# EAGLE board keyholders (EAGLE 9.4.0)
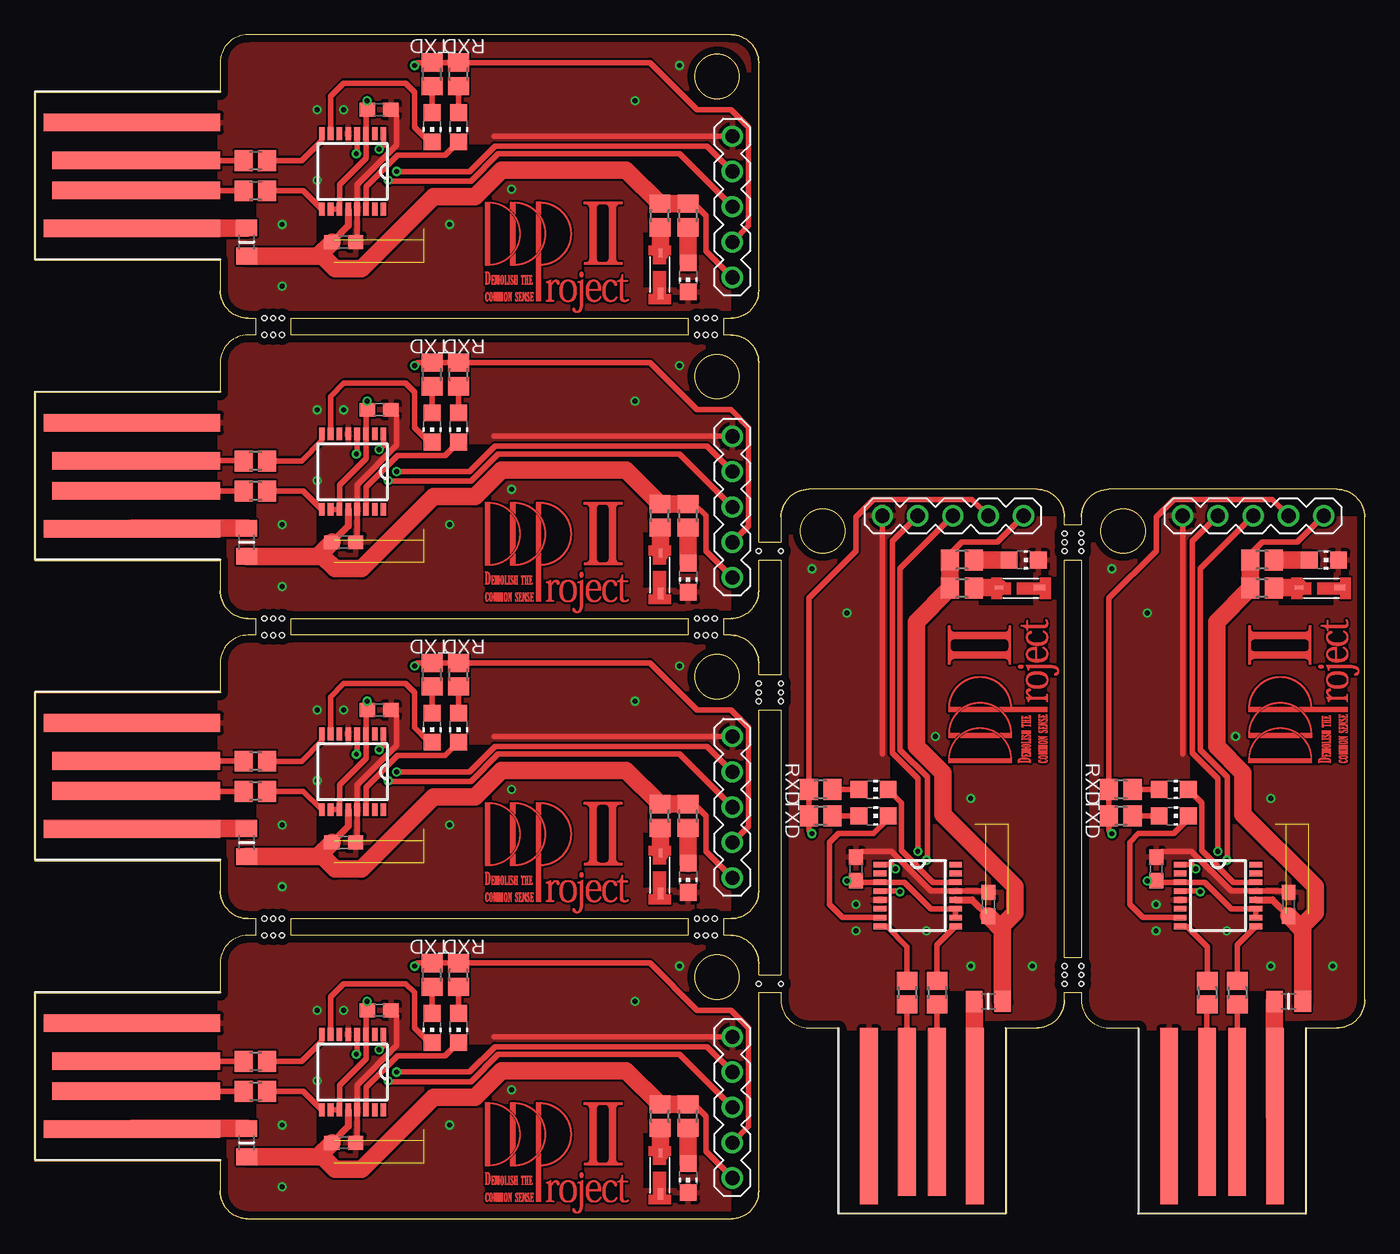
[diagram p0: board, top side]
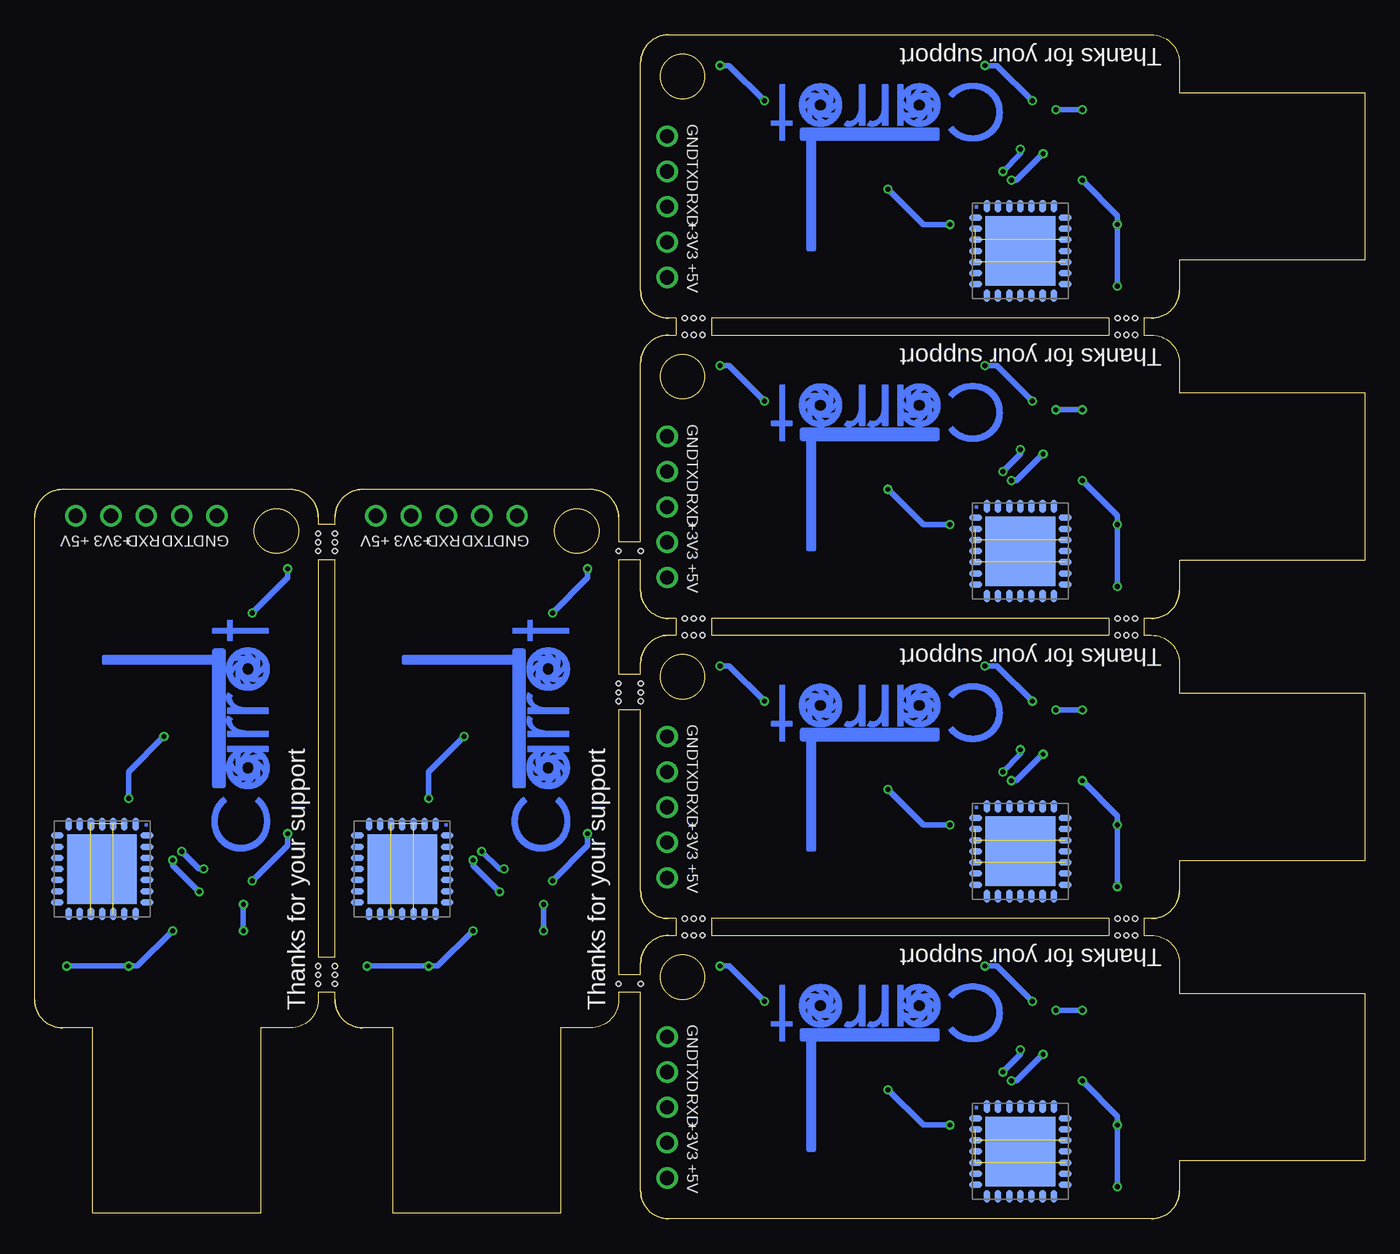
[diagram p1: board, bottom side, seen from below]

Size 95.65 x 85.16 mm. Coordinates in mm from the lower left corner, seen from the top.
Outline: 15.34,20.39 arc90 13.34,18.39
Outline: 50.07,20.39 arc-90 52.07,18.39
Outline: 52.07,2 arc-90 50.07,0
Outline: 15.34,0 arc-90 13.34,2
Outline: 13.34,2 arc90 15.34,0
Outline: 50.07,0 arc90 52.07,2
Outline: 52.07,18.39 arc90 50.07,20.39
Outline: 50.07,20.39 49.53,20.39 49.53,21.59 50.07,21.59
Outline: 15.34,20.39 15.88,20.39 15.88,21.59 15.34,21.59
Outline: 13.34,2 13.34,4.16 0,4.16 0,16.23 13.34,16.23 13.34,18.39
Outline: 13.34,2 arc90 15.34,0
Outline: 15.34,0 50.07,0
Outline: 50.07,0 arc90 52.07,2
Outline: 52.07,2 52.07,16.27 53.67,16.27 53.67,15.73
Outline: 52.07,18.39 52.07,17.54 53.67,17.54 53.67,36.59 52.07,36.59 52.07,23.59
Outline: 52.07,18.39 arc90 50.07,20.39
Outline: 15.34,20.39 arc90 13.34,18.39
Outline: 15.34,41.98 arc90 13.34,39.98
Outline: 50.07,41.98 arc-90 52.07,39.98
Outline: 52.07,23.59 arc-90 50.07,21.59
Outline: 15.34,21.59 arc-90 13.34,23.59
Outline: 13.34,23.59 arc90 15.34,21.59
Outline: 50.07,21.59 arc90 52.07,23.59
Outline: 52.07,39.98 arc90 50.07,41.98
Outline: 50.07,41.98 49.53,41.98 49.53,43.18 50.07,43.18
Outline: 15.34,41.98 15.88,41.98 15.88,43.18 15.34,43.18
Outline: 13.34,23.59 13.34,25.75 0,25.75 0,37.82 13.34,37.82 13.34,39.98
Outline: 13.34,23.59 arc90 15.34,21.59
Outline: 50.07,21.59 arc90 52.07,23.59
Outline: 52.07,39.98 52.07,39.13 53.67,39.13 53.67,47.39 52.07,47.39 52.07,45.18
Outline: 52.07,39.98 arc90 50.07,41.98
Outline: 15.34,41.98 arc90 13.34,39.98
Outline: 15.34,63.57 arc90 13.34,61.57
Outline: 50.07,63.57 arc-90 52.07,61.57
Outline: 52.07,45.18 arc-90 50.07,43.18
Outline: 15.34,43.18 arc-90 13.34,45.18
Outline: 13.34,45.18 arc90 15.34,43.18
Outline: 50.07,43.18 arc90 52.07,45.18
Outline: 52.07,61.57 arc90 50.07,63.57
Outline: 50.07,63.57 49.53,63.57 49.53,64.77 50.07,64.77
Outline: 15.34,63.57 15.88,63.57 15.88,64.77 15.34,64.77
Outline: 13.34,45.18 13.34,47.34 0,47.34 0,59.41 13.34,59.41 13.34,61.57
Outline: 13.34,45.18 arc90 15.34,43.18
Outline: 50.07,43.18 arc90 52.07,45.18
Outline: 52.07,61.57 52.07,48.66 53.67,48.66 53.67,50.47
Outline: 52.07,61.57 arc90 50.07,63.57
Outline: 15.34,63.57 arc90 13.34,61.57
Outline: 15.34,85.16 arc90 13.34,83.16
Outline: 50.07,85.16 arc-90 52.07,83.16
Outline: 52.07,66.77 arc-90 50.07,64.77
Outline: 15.34,64.77 arc-90 13.34,66.77
Outline: 13.34,66.77 arc90 15.34,64.77
Outline: 50.07,64.77 arc90 52.07,66.77
Outline: 52.07,83.16 arc90 50.07,85.16
Outline: 50.07,85.16 15.34,85.16
Outline: 13.34,66.77 13.34,68.93 0,68.93 0,81 13.34,81 13.34,83.16
Outline: 13.34,66.77 arc90 15.34,64.77
Outline: 50.07,64.77 arc90 52.07,66.77
Outline: 52.07,66.77 52.07,83.16
Outline: 52.07,83.16 arc90 50.07,85.16
Outline: 15.34,85.16 arc90 13.34,83.16
Outline: 53.67,15.73 arc90 55.67,13.73
Outline: 53.67,50.47 arc-90 55.67,52.47
Outline: 72.05,52.47 arc-90 74.06,50.47
Outline: 74.06,15.73 arc-90 72.06,13.73
Outline: 72.06,13.73 arc90 74.06,15.73
Outline: 74.06,50.47 arc90 72.05,52.47
Outline: 55.67,52.47 arc90 53.67,50.47
Outline: 72.06,13.73 69.89,13.73 69.89,0.4 57.83,0.4 57.83,13.73 55.67,13.73
Outline: 72.06,13.73 arc90 74.06,15.73
Outline: 74.06,15.73 74.06,16.27 75.26,16.27 75.26,15.73
Outline: 74.06,50.47 74.06,49.93 75.26,49.93 75.26,50.47
Outline: 74.06,50.47 arc90 72.05,52.47
Outline: 72.05,52.47 55.67,52.47
Outline: 55.67,52.47 arc90 53.67,50.47
Outline: 53.67,15.73 arc90 55.67,13.73
Outline: 75.26,15.73 arc90 77.26,13.73
Outline: 75.26,50.47 arc-90 77.26,52.47
Outline: 93.64,52.47 arc-90 95.65,50.47
Outline: 95.65,15.73 arc-90 93.65,13.73
Outline: 93.65,13.73 arc90 95.65,15.73
Outline: 95.65,50.47 arc90 93.64,52.47
Outline: 77.26,52.47 arc90 75.26,50.47
Outline: 93.65,13.73 91.48,13.73 91.48,0.4 79.42,0.4 79.42,13.73 77.26,13.73
Outline: 93.65,13.73 arc90 95.65,15.73
Outline: 95.65,15.73 95.65,50.47
Outline: 95.65,50.47 arc90 93.64,52.47
Outline: 93.64,52.47 77.26,52.47
Outline: 77.26,52.47 arc90 75.26,50.47
Outline: 75.26,15.73 arc90 77.26,13.73
Outline: 46.99,20.39 18.41,20.39 18.41,21.59 46.99,21.59 46.99,20.39
Outline: 46.99,41.98 18.41,41.98 18.41,43.18 46.99,43.18 46.99,41.98
Outline: 46.99,63.57 18.41,63.57 18.41,64.77 46.99,64.77 46.99,63.57
Outline: 74.06,18.81 74.06,47.39 75.26,47.39 75.26,18.81 74.06,18.81
Outline: circle at 49.07,17.39 radius 1.6
Outline: circle at 49.07,38.98 radius 1.6
Outline: circle at 49.07,60.57 radius 1.6
Outline: circle at 49.07,82.16 radius 1.6
Outline: circle at 56.67,49.47 radius 1.6
Outline: circle at 78.26,49.47 radius 1.6
Copper layers (1*16): Top 0.035mm / dielectric 1.6mm / Bottom 0.035mm
Design rules "Elecrow_2-layer_PCB_eagle_rule": minimum track width 6mil, minimum drill 12mil, track to track 6mil, track to pad 6mil, pad to pad 6mil, via to via 8mil, smd to smd 0mil, copper to edge 20mil, drill to drill 10mil, minimum pad ring 6mil, minimum via ring 6mil, stop-mask expansion 0mil, vias tented up to drill 100mil, thermal gap 10mil
Holes 0.35 mm at 16.51,20.39 17.14,20.39 17.78,20.39 47.62,20.39 48.26,20.39 48.9,20.39 52.07,16.91 16.51,21.59 16.51,41.98 17.14,41.98 17.78,41.98 47.62,41.98 48.26,41.98 48.9,41.98 52.07,37.23 52.07,37.86 52.07,38.5 17.14,21.59 17.78,21.59 47.62,21.59 48.26,21.59 48.9,21.59 16.51,43.18 16.51,63.57 17.14,63.57 17.78,63.57 47.62,63.57 48.26,63.57 48.9,63.57 17.14,43.18 17.78,43.18 47.62,43.18 48.26,43.18 48.9,43.18 16.51,64.77 17.14,64.77 17.78,64.77 47.62,64.77 48.26,64.77 48.9,64.77 74.06,16.91 53.67,16.91 53.67,48.02 74.06,17.54 74.06,18.18 74.06,48.02 74.06,48.66 74.06,49.29 75.26,16.91 75.26,17.54 75.26,18.18 75.26,48.02 75.26,48.66 75.26,49.29 53.67,38.5 53.67,37.86 53.67,37.23 52.07,48.02
tRestrict: 60 lines

## Footprints (pad centres in the part's own frame; a part is rotated, then mirrored left to right if it is on the bottom)
C1608 = smd 1.1 x 1: 1 -0.85,0; 2 0.85,0
R0805 = smd 1.3 x 1.5: 1 -0.85,0; 2 0.85,0
QFPN-28 = smd 0.9 x 0.45: 1 -3.225,2.4; 2 -3.225,1.6; 3 -3.225,0.8; 4 -3.225,0; 5 -3.225,-0.8; 6 -3.225,-1.6; 7 -3.225,-2.4; 15 3.225,-2.4; 16 3.225,-1.6; 17 3.225,-0.8; 18 3.225,0; 19 3.225,0.8; 20 3.225,1.6; 21 3.225,2.4 | smd 0.45 x 0.9: 8 -2.4,-3.225; 9 -1.6,-3.225; 10 -0.8,-3.225; 11 0,-3.225; 12 0.8,-3.225; 13 1.6,-3.225; 14 2.4,-3.225; 22 2.4,3.225; 23 1.6,3.225; 24 0.8,3.225; 25 0,3.225; 26 -0.8,3.225; 27 -1.6,3.225; 28 -2.4,3.225 | smd 5 x 5: TH 0,0
SSOP16 = smd 0.914 x 0.406: 1 -2.718,2.223; 2 -2.718,1.587; 3 -2.718,0.953; 4 -2.718,0.318; 5 -2.718,-0.318; 6 -2.718,-0.953; 7 -2.718,-1.587; 8 -2.718,-2.223; 9 2.718,-2.223; 10 2.718,-1.587; 11 2.718,-0.953; 12 2.718,-0.318; 13 2.718,0.318; 14 2.718,0.953; 15 2.718,1.587; 16 2.718,2.223
CHIP-LED0805 = smd 1.2 x 1.2: A 0,-1.05; C 0,1.05
MA05-1 = drill 1.016: 1 -5.08,0; 2 -2.54,0; 3 0,0; 4 2.54,0; 5 5.08,0
USB = smd 1.27 x 12.065: D+ 7.176,6.032; D- 5.016,6.032 | smd 1.27 x 12.7: GND 9.906,6.35; VCC 2.286,6.35
NSSW157T = smd 0.61 x 0.305: ANODE 3.683,0.711 | smd 0.813 x 0.406: CATHODE 0.762,0.711
F0805MP = smd 1.2 x 1.5: 1 -1.016,0; 2 1.016,0

## Placement (x,y rotation side)
C1  0.1u  [C1608]  22.23,5.48 0 top
C2  0.1u  [C1608]  24.77,15 0 top
C3  0.1u  [C1608]  22.23,27.07 0 top
C4  0.1u  [C1608]  24.77,36.59 0 top
C5  0.1u  [C1608]  22.23,48.66 0 top
C6  0.1u  [C1608]  24.77,58.18 0 top
C7  0.1u  [C1608]  22.23,70.25 0 top
C8  0.1u  [C1608]  24.77,79.77 0 top
C9  0.1u  [C1608]  68.58,22.62 90 top
C10  0.1u  [C1608]  59.05,25.16 90 top
C11  0.1u  [C1608]  90.17,22.62 90 top
C12  0.1u  [C1608]  80.64,25.16 90 top
FT-R1  330  [R0805]  28.57,17.54 90 top
FT-R2  330  [R0805]  30.48,17.54 90 top
FT-R3  27  [R0805]  15.88,11.32 180 top
FT-R4  27  [R0805]  15.88,9.16 180 top
FT-R5  330  [R0805]  46.99,7.38 90 top
FT-R6  100  [R0805]  44.96,7.38 90 top
FT-R7  330  [R0805]  28.57,39.13 90 top
FT-R8  330  [R0805]  30.48,39.13 90 top
FT-R9  27  [R0805]  15.88,32.91 180 top
FT-R10  27  [R0805]  15.88,30.75 180 top
FT-R11  330  [R0805]  46.99,28.97 90 top
FT-R12  100  [R0805]  44.96,28.97 90 top
FT-R13  330  [R0805]  28.57,60.72 90 top
FT-R14  330  [R0805]  30.48,60.72 90 top
FT-R15  27  [R0805]  15.88,54.5 180 top
FT-R16  27  [R0805]  15.88,52.34 180 top
FT-R17  330  [R0805]  46.99,50.56 90 top
FT-R18  100  [R0805]  44.96,50.56 90 top
FT-R19  330  [R0805]  28.57,82.31 90 top
FT-R20  330  [R0805]  30.48,82.31 90 top
FT-R21  27  [R0805]  15.88,76.09 180 top
FT-R22  27  [R0805]  15.88,73.93 180 top
FT-R23  330  [R0805]  46.99,72.15 90 top
FT-R24  100  [R0805]  44.96,72.15 90 top
FT-R25  330  [R0805]  56.52,28.97 180 top
FT-R26  330  [R0805]  56.52,30.88 180 top
FT-R27  27  [R0805]  62.74,16.27 270 top
FT-R28  27  [R0805]  64.9,16.27 270 top
FT-R29  330  [R0805]  66.67,47.39 180 top
FT-R30  100  [R0805]  66.67,45.35 180 top
FT-R31  330  [R0805]  78.11,28.97 180 top
FT-R32  330  [R0805]  78.11,30.88 180 top
FT-R33  27  [R0805]  84.33,16.27 270 top
FT-R34  27  [R0805]  86.49,16.27 270 top
FT-R35  330  [R0805]  88.27,47.39 180 top
FT-R36  100  [R0805]  88.27,45.35 180 top
IC1  LIS3LV02DQ  [QFPN-28]  24.77,4.84 0 bottom
IC2  FT230XS  [SSOP16]  22.86,32.15 270 top
IC3  FT230XS  [SSOP16]  22.86,10.56 270 top
IC4  LIS3LV02DQ  [QFPN-28]  24.77,26.43 0 bottom
IC5  FT230XS  [SSOP16]  22.86,53.74 270 top
IC6  LIS3LV02DQ  [QFPN-28]  24.77,48.02 0 bottom
IC7  FT230XS  [SSOP16]  22.86,75.33 270 top
IC8  LIS3LV02DQ  [QFPN-28]  24.77,69.61 0 bottom
IC9  FT230XS  [SSOP16]  63.5,23.26 0 top
IC10  LIS3LV02DQ  [QFPN-28]  69.22,25.16 270 bottom
IC11  FT230XS  [SSOP16]  85.09,23.26 0 top
IC12  LIS3LV02DQ  [QFPN-28]  90.81,25.16 270 bottom
LED1  [CHIP-LED0805]  46.99,24.53 180 top
LED2  [CHIP-LED0805]  46.99,46.12 180 top
LED3  [CHIP-LED0805]  46.99,2.94 180 top
LED4  [CHIP-LED0805]  46.99,67.71 180 top
LED5  [CHIP-LED0805]  71.12,47.39 270 top
LED6  [CHIP-LED0805]  92.71,47.39 270 top
RX-LED  [CHIP-LED0805]  30.48,13.73 180 top
RX-LED1  [CHIP-LED0805]  30.48,35.32 180 top
RX-LED2  [CHIP-LED0805]  30.48,56.91 180 top
RX-LED3  [CHIP-LED0805]  30.48,78.5 180 top
RX-LED4  [CHIP-LED0805]  60.33,30.88 270 top
RX-LED5  [CHIP-LED0805]  81.92,30.88 270 top
SV1  [MA05-1]  50.16,8.02 90 top
SV2  [MA05-1]  50.16,29.61 90 top
SV3  [MA05-1]  50.16,51.2 90 top
SV4  [MA05-1]  50.16,72.79 90 top
SV5  [MA05-1]  66.04,50.56 180 top
SV6  [MA05-1]  87.63,50.56 180 top
TX-LED  [CHIP-LED0805]  28.57,13.73 180 top
TX-LED1  [CHIP-LED0805]  28.57,35.32 180 top
TX-LED2  [CHIP-LED0805]  28.57,56.91 180 top
TX-LED3  [CHIP-LED0805]  28.57,78.5 180 top
TX-LED4  [CHIP-LED0805]  60.33,28.97 270 top
TX-LED5  [CHIP-LED0805]  81.92,28.97 270 top
U$1  USB-PAD  [USB]  13.34,25.75 90 top
U$2  USB-PAD  [USB]  13.34,4.16 90 top
U$3  I-05318_ＮＳＳＷ１５７Ｔ  [NSSW157T]  45.72,1.03 90 top
U$4  I-05318_ＮＳＳＷ１５７Ｔ  [NSSW157T]  45.72,22.62 90 top
U$5  [CARROT]  26.04,16.91 180 bottom
U$6  [DDPROJECT2-TOP]  32.38,0.4 0 top
U$7  [CARROT]  26.04,38.5 180 bottom
U$8  [DDPROJECT2-TOP]  32.38,21.99 0 top
U$9  USB-PAD  [USB]  13.34,47.34 90 top
U$10  I-05318_ＮＳＳＷ１５７Ｔ  [NSSW157T]  45.72,44.21 90 top
U$11  [CARROT]  26.04,60.09 180 bottom
U$12  [DDPROJECT2-TOP]  32.38,43.58 0 top
U$13  USB-PAD  [USB]  13.34,68.93 90 top
U$14  I-05318_ＮＳＳＷ１５７Ｔ  [NSSW157T]  45.72,65.8 90 top
U$15  [CARROT]  26.04,81.68 180 bottom
U$16  [DDPROJECT2-TOP]  32.38,65.17 0 top
U$17  USB-PAD  [USB]  69.89,13.73 180 top
U$18  I-05318_ＮＳＳＷ１５７Ｔ  [NSSW157T]  73.03,46.12 180 top
U$19  [CARROT]  57.15,26.43 90 bottom
U$20  [DDPROJECT2-TOP]  73.66,32.78 90 top
U$21  USB-PAD  [USB]  91.48,13.73 180 top
U$22  I-05318_ＮＳＳＷ１５７Ｔ  [NSSW157T]  94.61,46.12 180 top
U$23  [CARROT]  78.74,26.43 90 bottom
U$24  [DDPROJECT2-TOP]  95.25,32.78 90 top
USB-POLY1  350mA  [F0805MP]  15.24,5.48 90 top
USB-POLY2  350mA  [F0805MP]  15.24,27.07 90 top
USB-POLY3  350mA  [F0805MP]  15.24,48.66 90 top
USB-POLY4  350mA  [F0805MP]  15.24,70.25 90 top
USB-POLY5  350mA  [F0805MP]  68.58,15.64 180 top
USB-POLY6  350mA  [F0805MP]  90.17,15.64 180 top

## Library data of the parts
C1-C12 = resistor
FT-R1-FT-R36 = 0@Mylibrary-main1
IC1 IC4 IC6 IC8 IC10 IC12 = st-microelectronics; MF: Arrow Electronics; MPN: LIS3LV02DQ; OC_FARNELL: 1220909; OC_NEWARK: 89K0642
IC2 IC3 IC5 IC7 IC9 IC11 = ftdichip
LED1-LED6 RX-LED RX-LED1-RX-LED5 TX-LED TX-LED1-TX-LED5 = led
SV1-SV6 = 0con-lstb; OC_FARNELL: unknown; OC_NEWARK: unknown
U$1 U$2 U$9 U$13 U$17 U$21 = USB-PAD
U$3 U$4 U$10 U$14 U$18 U$22 = Akizuki
U$5-U$8 U$11 U$12 U$15 U$16 U$19 U$20 U$23 U$24 = Carrot
USB-POLY1-USB-POLY6 = polyswitch

## Nets
+3V3-FT: C2.1 FT-R1.2 FT-R2.2 IC3.3 IC3.10 IC3.11 SV1.2
+3V3-FT1: C4.1 FT-R7.2 FT-R8.2 IC2.3 IC2.10 IC2.11 SV2.2
+3V3-FT2: C6.1 FT-R13.2 FT-R14.2 IC5.3 IC5.10 IC5.11 SV3.2
+3V3-FT3: C8.1 FT-R19.2 FT-R20.2 IC7.3 IC7.10 IC7.11 SV4.2
+3V3-FT4: C10.1 FT-R25.2 FT-R26.2 IC9.3 IC9.10 IC9.11 SV5.2
+3V3-FT5: C12.1 FT-R31.2 FT-R32.2 IC11.3 IC11.10 IC11.11 SV6.2
GND: IC1.2 IC1.5 IC1.17
GND1: IC4.2 IC4.5 IC4.17
GND2: IC6.2 IC6.5 IC6.17
GND3: IC8.2 IC8.5 IC8.17
GND4: IC10.2 IC10.5 IC10.17
GND5: IC12.2 IC12.5 IC12.17
GNDA: C1.2 C2.2 IC3.5 IC3.13 LED3.C SV1.5 U$2.GND U$3.CATHODE
GNDA1: C3.2 C4.2 IC2.5 IC2.13 LED1.C SV2.5 U$1.GND U$4.CATHODE
GNDA2: C5.2 C6.2 IC5.5 IC5.13 LED2.C SV3.5 U$9.GND U$10.CATHODE
GNDA3: C7.2 C8.2 IC7.5 IC7.13 LED4.C SV4.5 U$13.GND U$14.CATHODE
GNDA4: C9.2 C10.2 IC9.5 IC9.13 LED5.C SV5.5 U$17.GND U$18.CATHODE
GNDA5: C11.2 C12.2 IC11.5 IC11.13 LED6.C SV6.5 U$21.GND U$22.CATHODE
N$1: FT-R9.1 IC2.8
N$2: FT-R10.1 IC2.9
N$3: FT-R8.1 RX-LED1.A
N$4: FT-R7.1 TX-LED1.A
N$5: FT-R9.2 U$1.D+
N$6: FT-R10.2 U$1.D-
N$7: U$1.VCC USB-POLY2.2
N$8: FT-R11.1 LED1.A
N$9: FT-R12.1 U$4.ANODE
N$10: FT-R15.1 IC5.8
N$11: FT-R16.1 IC5.9
N$12: FT-R14.1 RX-LED2.A
N$13: FT-R13.1 TX-LED2.A
N$14: FT-R15.2 U$9.D+
N$15: FT-R16.2 U$9.D-
N$16: U$9.VCC USB-POLY3.2
N$17: FT-R17.1 LED2.A
N$18: FT-R18.1 U$10.ANODE
N$19: FT-R2.1 RX-LED.A
N$20: FT-R1.1 TX-LED.A
N$21: FT-R21.1 IC7.8
N$22: FT-R3.2 U$2.D+
N$23: FT-R3.1 IC3.8
N$24: FT-R4.1 IC3.9
N$25: FT-R4.2 U$2.D-
N$26: FT-R22.1 IC7.9
N$27: U$2.VCC USB-POLY1.2
N$28: FT-R5.1 LED3.A
N$29: FT-R6.1 U$3.ANODE
N$30: FT-R20.1 RX-LED3.A
N$31: FT-R19.1 TX-LED3.A
N$32: FT-R21.2 U$13.D+
N$33: FT-R22.2 U$13.D-
N$34: U$13.VCC USB-POLY4.2
N$35: FT-R23.1 LED4.A
N$36: FT-R24.1 U$14.ANODE
N$37: FT-R27.1 IC9.8
N$38: FT-R28.1 IC9.9
N$39: FT-R26.1 RX-LED4.A
N$40: FT-R25.1 TX-LED4.A
N$41: FT-R27.2 U$17.D+
N$42: FT-R28.2 U$17.D-
N$43: U$17.VCC USB-POLY5.2
N$44: FT-R29.1 LED5.A
N$45: FT-R30.1 U$18.ANODE
N$46: FT-R33.1 IC11.8
N$47: FT-R34.1 IC11.9
N$48: FT-R32.1 RX-LED5.A
N$49: FT-R31.1 TX-LED5.A
N$50: FT-R33.2 U$21.D+
N$51: FT-R34.2 U$21.D-
N$52: U$21.VCC USB-POLY6.2
N$53: FT-R35.1 LED6.A
N$54: FT-R36.1 U$22.ANODE
RXD: IC3.4 SV1.3
RXD1: IC2.4 SV2.3
RXD2: IC5.4 SV3.3
RXD3: IC7.4 SV4.3
RXD4: IC9.4 SV5.3
RXD5: IC11.4 SV6.3
RXLED: IC3.14 RX-LED.C
RXLED1: IC2.14 RX-LED1.C
RXLED2: IC5.14 RX-LED2.C
RXLED3: IC7.14 RX-LED3.C
RXLED4: IC9.14 RX-LED4.C
RXLED5: IC11.14 RX-LED5.C
TXD: IC3.1 SV1.4
TXD1: IC2.1 SV2.4
TXD2: IC5.1 SV3.4
TXD3: IC7.1 SV4.4
TXD4: IC9.1 SV5.4
TXD5: IC11.1 SV6.4
TXLED: IC3.7 TX-LED.C
TXLED1: IC2.7 TX-LED1.C
TXLED2: IC5.7 TX-LED2.C
TXLED3: IC7.7 TX-LED3.C
TXLED4: IC9.7 TX-LED4.C
TXLED5: IC11.7 TX-LED5.C
V+: C1.1 FT-R5.2 FT-R6.2 IC3.12 SV1.1 USB-POLY1.1
V+1: C3.1 FT-R11.2 FT-R12.2 IC2.12 SV2.1 USB-POLY2.1
V+2: C5.1 FT-R17.2 FT-R18.2 IC5.12 SV3.1 USB-POLY3.1
V+3: C7.1 FT-R23.2 FT-R24.2 IC7.12 SV4.1 USB-POLY4.1
V+4: C9.1 FT-R29.2 FT-R30.2 IC9.12 SV5.1 USB-POLY5.1
V+5: C11.1 FT-R35.2 FT-R36.2 IC11.12 SV6.1 USB-POLY6.1
VDD: IC1.3 IC1.19
VDD1: IC4.3 IC4.19
VDD2: IC6.3 IC6.19
VDD3: IC8.3 IC8.19
VDD4: IC10.3 IC10.19
VDD5: IC12.3 IC12.19
VDD_IO: IC1.11
VDD_IO1: IC4.11
VDD_IO2: IC6.11
VDD_IO3: IC8.11
VDD_IO4: IC10.11
VDD_IO5: IC12.11

## Tracks (layer width: path | path; a pad name or v marks a point on that pad's centre or on a via)
+3V3-FT  (via drill 0.35)
  Top 0.406: IC3.10 IC3.11 21.91,9.6 23.81,11.51 IC3.3 23.81,14.9 C2.1 v23.91,15.64 | SV1.2 51.33,6.65 51.33,13.73 50.06,15 47.62,15 44.23,18.39 FT-R2.2 FT-R1.2 27.52,18.39 v27.3,18.18
  Bottom 0.406: v23.91,15.64 26.45,18.18 v27.3,18.18
+3V3-FT1  (via drill 0.35)
  Top 0.406: IC2.10 IC2.11 21.91,31.19 23.81,33.1 IC2.3 23.81,36.49 C4.1 v23.91,37.23 | SV2.2 51.33,28.24 51.33,35.32 50.06,36.59 47.62,36.59 44.23,39.98 FT-R8.2 FT-R7.2 27.52,39.98 v27.3,39.77
  Bottom 0.406: v23.91,37.23 26.45,39.77 v27.3,39.77
+3V3-FT2  (via drill 0.35)
  Top 0.406: IC5.10 IC5.11 21.91,52.78 23.81,54.69 IC5.3 23.81,58.08 C6.1 v23.91,58.82 | SV3.2 51.33,49.83 51.33,56.91 50.06,58.18 47.62,58.18 44.23,61.57 FT-R14.2 FT-R13.2 27.52,61.57 v27.3,61.36
  Bottom 0.406: v23.91,58.82 26.45,61.36 v27.3,61.36
+3V3-FT3  (via drill 0.35)
  Top 0.406: IC7.10 IC7.11 21.91,74.37 23.81,76.28 IC7.3 23.81,79.67 C8.1 v23.91,80.41 | SV4.2 51.33,71.42 51.33,78.5 50.06,79.77 47.62,79.77 44.23,83.16 FT-R20.2 FT-R19.2 27.52,83.16 v27.3,82.95
  Bottom 0.406: v23.91,80.41 26.45,82.95 v27.3,82.95
+3V3-FT4  (via drill 0.35)
  Top 0.406: IC9.10 IC9.11 64.45,22.3 62.55,24.21 IC9.3 59.16,24.21 C10.1 v58.42,24.31 | SV5.2 67.41,51.73 60.33,51.73 59.05,50.46 59.05,48.02 55.66,44.63 FT-R26.2 FT-R25.2 55.66,27.92 v55.88,27.7
  Bottom 0.406: v58.42,24.31 55.88,26.85 v55.88,27.7
+3V3-FT5  (via drill 0.35)
  Top 0.406: IC11.10 IC11.11 86.04,22.3 84.14,24.21 IC11.3 80.75,24.21 C12.1 v80.01,24.31 | SV6.2 89,51.73 81.92,51.73 80.64,50.46 80.64,48.02 77.25,44.63 FT-R32.2 FT-R31.2 77.25,27.92 v77.47,27.7
  Bottom 0.406: v80.01,24.31 77.47,26.85 v77.47,27.7
GND  (2 unrouted)
GND1  (2 unrouted)
GND2  (2 unrouted)
GND3  (2 unrouted)
GND4  (2 unrouted)
GND5  (2 unrouted)
GNDA  (via drill 0.35)
  Top 0.406: C1.2 23.18,5.58 IC3.13 23.18,9.6 26.04,12.46 26.04,14.58 C2.2 | 33.02,13.1 SV1.5
  Bottom 0.406: v34.29,9.29 31.75,6.75 v29.84,6.75 | v17.78,2.3 v17.78,6.75 17.78,7.38 v20.32,9.92 | v20.32,15 v22.23,15 | v43.18,15.64 45.72,18.18 v46.35,18.18
  pour Top: 13.34,20.08 52.07,20.08 52.07,0.4 13.34,0.4
GNDA1  (via drill 0.35)
  Top 0.406: C3.2 23.18,27.17 IC2.13 23.18,31.19 26.04,34.05 26.04,36.17 C4.2 | 33.02,34.69 SV2.5
  Bottom 0.406: v34.29,30.88 31.75,28.34 v29.84,28.34 | v17.78,23.89 v17.78,28.34 17.78,28.97 v20.32,31.51 | v20.32,36.59 v22.23,36.59 | v43.18,37.23 45.72,39.77 v46.35,39.77
  pour Top: 13.34,41.67 52.07,41.67 52.07,21.99 13.34,21.99
GNDA2  (via drill 0.35)
  Top 0.406: C5.2 23.18,48.76 IC5.13 23.18,52.78 26.04,55.64 26.04,57.76 C6.2 | 33.02,56.28 SV3.5
  Bottom 0.406: v34.29,52.47 31.75,49.93 v29.84,49.93 | v17.78,45.48 v17.78,49.93 17.78,50.56 v20.32,53.1 | v20.32,58.18 v22.23,58.18 | v43.18,58.82 45.72,61.36 v46.35,61.36
  pour Top: 13.34,63.26 52.07,63.26 52.07,43.58 13.34,43.58
GNDA3  (via drill 0.35)
  Top 0.406: C7.2 23.18,70.35 IC7.13 23.18,74.37 26.04,77.23 26.04,79.35 C8.2 | 33.02,77.87 SV4.5
  Bottom 0.406: v34.29,74.06 31.75,71.52 v29.84,71.52 | v17.78,67.07 v17.78,71.52 17.78,72.15 v20.32,74.69 | v20.32,79.77 v22.23,79.77 | v43.18,80.41 45.72,82.95 v46.35,82.95
  pour Top: 13.34,84.85 52.07,84.85 52.07,65.17 13.34,65.17
GNDA4  (via drill 0.35)
  Top 0.406: C9.2 68.48,23.57 IC9.13 64.45,23.57 61.59,26.43 59.48,26.43 C10.2 | 60.96,33.42 SV5.5
  Bottom 0.406: v64.77,34.69 67.31,32.15 v67.31,30.24 | v71.75,18.18 v67.31,18.18 66.67,18.18 v64.14,20.72 | v59.05,20.72 v59.05,22.62 | v58.42,43.58 55.88,46.12 v55.88,46.75
  pour Top: 53.98,13.73 53.98,52.47 73.66,52.47 73.66,13.73
GNDA5  (via drill 0.35)
  Top 0.406: C11.2 90.07,23.57 IC11.13 86.04,23.57 83.19,26.43 81.06,26.43 C12.2 | 82.55,33.42 SV6.5
  Bottom 0.406: v86.36,34.69 88.9,32.15 v88.9,30.24 | v93.34,18.18 v88.9,18.18 88.27,18.18 v85.72,20.72 | v80.64,20.72 v80.64,22.62 | v80.01,43.58 77.47,46.12 v77.47,46.75
  pour Top: 75.56,13.73 75.56,52.47 95.25,52.47 95.25,13.73
N$1
  Top 0.406: IC2.8 20.64,34.37 19.18,32.91 FT-R9.1
N$2
  Top 0.406: IC2.9 19.32,30.75 FT-R10.1
N$3
  Top 0.406: FT-R8.1 RX-LED1.A
N$4
  Top 0.406: TX-LED1.A FT-R7.1
N$5
  Top 0.406: U$1.D+ 15,32.93 FT-R9.2
N$6
  Top 0.406: U$1.D- 7.32,30.75 FT-R10.2
N$7
  Top 1.27: U$1.VCC 7.03,28.08 USB-POLY2.2
N$8
  Top 1.27: LED1.A FT-R11.1
N$9
  Top 1.27: FT-R12.1 45.01,28.07 U$4.ANODE
N$10
  Top 0.406: IC5.8 20.64,55.96 19.18,54.5 FT-R15.1
N$11
  Top 0.406: IC5.9 19.32,52.34 FT-R16.1
N$12
  Top 0.406: FT-R14.1 RX-LED2.A
N$13
  Top 0.406: TX-LED2.A FT-R13.1
N$14
  Top 0.406: U$9.D+ 15,54.52 FT-R15.2
N$15
  Top 0.406: U$9.D- 7.32,52.34 FT-R16.2
N$16
  Top 1.27: U$9.VCC 7.03,49.67 USB-POLY3.2
N$17
  Top 1.27: LED2.A FT-R17.1
N$18
  Top 1.27: FT-R18.1 45.01,49.66 U$10.ANODE
N$19
  Top 0.406: FT-R2.1 RX-LED.A
N$20
  Top 0.406: TX-LED.A FT-R1.1
N$21
  Top 0.406: IC7.8 20.64,77.55 19.18,76.09 FT-R21.1
N$22
  Top 0.406: U$2.D+ 15,11.34 FT-R3.2
N$23
  Top 0.406: IC3.8 20.64,12.78 19.18,11.32 FT-R3.1
N$24
  Top 0.406: IC3.9 19.32,9.16 FT-R4.1
N$25
  Top 0.406: U$2.D- 7.32,9.16 FT-R4.2
N$26
  Top 0.406: IC7.9 19.32,73.93 FT-R22.1
N$27
  Top 1.27: U$2.VCC 7.03,6.49 USB-POLY1.2
N$28
  Top 1.27: LED3.A FT-R5.1
N$29
  Top 1.27: FT-R6.1 45.01,6.48 U$3.ANODE
N$30
  Top 0.406: FT-R20.1 RX-LED3.A
N$31
  Top 0.406: TX-LED3.A FT-R19.1
N$32
  Top 0.406: U$13.D+ 15,76.11 FT-R21.2
N$33
  Top 0.406: U$13.D- 7.32,73.93 FT-R22.2
N$34
  Top 1.27: U$13.VCC 7.03,71.26 USB-POLY4.2
N$35
  Top 1.27: LED4.A FT-R23.1
N$36
  Top 1.27: FT-R24.1 45.01,71.25 U$14.ANODE
N$37
  Top 0.406: IC9.8 61.28,21.03 62.74,19.57 FT-R27.1
N$38
  Top 0.406: IC9.9 64.9,19.71 FT-R28.1
N$39
  Top 0.406: FT-R26.1 RX-LED4.A
N$40
  Top 0.406: TX-LED4.A FT-R25.1
N$41
  Top 0.406: U$17.D+ 62.72,15.4 FT-R27.2
N$42
  Top 0.406: U$17.D- 64.9,7.72 FT-R28.2
N$43
  Top 1.27: U$17.VCC 67.56,7.42 USB-POLY5.2
N$44
  Top 1.27: LED5.A FT-R29.1
N$45
  Top 1.27: FT-R30.1 67.58,45.41 U$18.ANODE
N$46
  Top 0.406: IC11.8 82.87,21.03 84.33,19.57 FT-R33.1
N$47
  Top 0.406: IC11.9 86.49,19.71 FT-R34.1
N$48
  Top 0.406: FT-R32.1 RX-LED5.A
N$49
  Top 0.406: TX-LED5.A FT-R31.1
N$50
  Top 0.406: U$21.D+ 84.31,15.4 FT-R33.2
N$51
  Top 0.406: U$21.D- 86.49,7.72 FT-R34.2
N$52
  Top 1.27: U$21.VCC 89.15,7.42 USB-POLY6.2
N$53
  Top 1.27: LED6.A FT-R35.1
N$54
  Top 1.27: FT-R36.1 89.17,45.41 U$22.ANODE
RXD  (via drill 0.35)
  Top 0.406: IC3.4 23.18,11.87 v23.13,11.83 | SV1.3 46.36,11.83 33.33,11.83 31.37,9.87 25.45,9.87 v25.4,9.92
  Bottom 0.406: v25.4,9.92 25.04,9.92 v23.13,11.83
RXD1  (via drill 0.35)
  Top 0.406: IC2.4 23.18,33.46 v23.13,33.42 | SV2.3 46.36,33.42 33.33,33.42 31.37,31.46 25.45,31.46 v25.4,31.51
  Bottom 0.406: v25.4,31.51 25.04,31.51 v23.13,33.42
RXD2  (via drill 0.35)
  Top 0.406: IC5.4 23.18,55.05 v23.13,55.01 | SV3.3 46.36,55.01 33.33,55.01 31.37,53.05 25.45,53.05 v25.4,53.1
  Bottom 0.406: v25.4,53.1 25.04,53.1 v23.13,55.01
RXD3  (via drill 0.35)
  Top 0.406: IC7.4 23.18,76.64 v23.13,76.6 | SV4.3 46.36,76.6 33.33,76.6 31.37,74.64 25.45,74.64 v25.4,74.69
  Bottom 0.406: v25.4,74.69 25.04,74.69 v23.13,76.6
RXD4  (via drill 0.35)
  Top 0.406: IC9.4 62.18,23.57 v62.23,23.53 | SV5.3 62.23,46.75 62.23,33.73 64.19,31.77 64.19,25.85 v64.14,25.8
  Bottom 0.406: v64.14,25.8 64.14,25.43 v62.23,23.53
RXD5  (via drill 0.35)
  Top 0.406: IC11.4 83.77,23.57 v83.82,23.53 | SV6.3 83.82,46.75 83.82,33.73 85.78,31.77 85.78,25.85 v85.72,25.8
  Bottom 0.406: v85.72,25.8 85.72,25.43 v83.82,23.53
RXLED
  Top 0.406: RX-LED.C 29.52,11.73 26.09,11.73 23.81,9.45 IC3.14
RXLED1
  Top 0.406: RX-LED1.C 29.52,33.32 26.09,33.32 23.81,31.04 IC2.14
RXLED2
  Top 0.406: RX-LED2.C 29.52,54.91 26.09,54.91 23.81,52.63 IC5.14
RXLED3
  Top 0.406: RX-LED3.C 29.52,76.5 26.09,76.5 23.81,74.22 IC7.14
RXLED4
  Top 0.406: RX-LED4.C 62.33,29.92 62.33,26.49 64.61,24.21 IC9.14
RXLED5
  Top 0.406: RX-LED5.C 83.92,29.92 83.92,26.49 86.2,24.21 IC11.14
TXD  (via drill 0.35)
  Top 0.406: IC3.1 25.08,12.47 v24.76,12.15 | SV1.4 48.34,12.38 33.1,12.38 31.27,10.56 v26.04,10.56
  Bottom 0.406: v26.04,10.56 24.76,11.83 v24.76,12.15
TXD1  (via drill 0.35)
  Top 0.406: IC2.1 25.08,34.06 v24.76,33.74 | SV2.4 48.34,33.97 33.1,33.97 31.27,32.15 v26.04,32.15
  Bottom 0.406: v26.04,32.15 24.76,33.42 v24.76,33.74
TXD2  (via drill 0.35)
  Top 0.406: IC5.1 25.08,55.65 v24.76,55.33 | SV3.4 48.34,55.56 33.1,55.56 31.27,53.74 v26.04,53.74
  Bottom 0.406: v26.04,53.74 24.76,55.01 v24.76,55.33
TXD3  (via drill 0.35)
  Top 0.406: IC7.1 25.08,77.24 v24.76,76.92 | SV4.4 48.34,77.15 33.1,77.15 31.27,75.33 v26.04,75.33
  Bottom 0.406: v26.04,75.33 24.76,76.6 v24.76,76.92
TXD4  (via drill 0.35)
  Top 0.406: IC9.1 61.58,25.48 v61.91,25.15 | SV5.4 61.67,48.73 61.67,33.49 63.5,31.67 v63.5,26.43
  Bottom 0.406: v63.5,26.43 62.22,25.15 v61.91,25.15
TXD5  (via drill 0.35)
  Top 0.406: IC11.1 83.17,25.48 v83.5,25.15 | SV6.4 83.26,48.73 83.26,33.49 85.09,31.67 v85.09,26.43
  Bottom 0.406: v85.09,26.43 83.81,25.15 v83.5,25.15
TXLED
  Top 0.406: IC3.7 21.27,15.95 22.23,16.91 26.67,16.91 27.3,16.27 27.3,13.73 28.36,12.68 TX-LED.C
TXLED1
  Top 0.406: IC2.7 21.27,37.54 22.23,38.5 26.67,38.5 27.3,37.86 27.3,35.32 28.36,34.27 TX-LED1.C
TXLED2
  Top 0.406: IC5.7 21.27,59.13 22.23,60.09 26.67,60.09 27.3,59.45 27.3,56.91 28.36,55.86 TX-LED2.C
TXLED3
  Top 0.406: IC7.7 21.27,80.72 22.23,81.68 26.67,81.68 27.3,81.04 27.3,78.5 28.36,77.45 TX-LED3.C
TXLED4
  Top 0.406: IC9.7 58.1,21.67 57.15,22.62 57.15,27.07 57.78,27.7 60.33,27.7 61.38,28.75 TX-LED4.C
TXLED5
  Top 0.406: IC11.7 79.69,21.67 78.74,22.62 78.74,27.07 79.38,27.7 81.92,27.7 82.97,28.75 TX-LED5.C
V+
  Top 0.406: SV1.1 48.26,4.84 48.26,7.38 47.41,8.23 FT-R5.2
  Top 0.508: C1.1 22.54,6.64 IC3.12
  Top 1.27: 20.36,4.46 C1.1 | USB-POLY1.1 20.36,4.46 | 20.36,4.46 20.7,4.46 21.59,3.57 23.5,3.57 28.68,8.76 31.66,8.76 33.56,10.65 42.54,10.65 FT-R6.2 FT-R5.2
V+1
  Top 0.406: SV2.1 48.26,26.43 48.26,28.97 47.41,29.82 FT-R11.2
  Top 0.508: C3.1 22.54,28.23 IC2.12
  Top 1.27: 20.36,26.05 C3.1 | USB-POLY2.1 20.36,26.05 | 20.36,26.05 20.7,26.05 21.59,25.16 23.5,25.16 28.68,30.35 31.66,30.35 33.56,32.24 42.54,32.24 FT-R12.2 FT-R11.2
V+2
  Top 0.406: SV3.1 48.26,48.02 48.26,50.56 47.41,51.41 FT-R17.2
  Top 0.508: C5.1 22.54,49.82 IC5.12
  Top 1.27: 20.36,47.64 C5.1 | USB-POLY3.1 20.36,47.64 | 20.36,47.64 20.7,47.64 21.59,46.75 23.5,46.75 28.68,51.94 31.66,51.94 33.56,53.83 42.54,53.83 FT-R18.2 FT-R17.2
V+3
  Top 0.406: SV4.1 48.26,69.61 48.26,72.15 47.41,73 FT-R23.2
  Top 0.508: C7.1 22.54,71.41 IC7.12
  Top 1.27: 20.36,69.23 C7.1 | USB-POLY4.1 20.36,69.23 | 20.36,69.23 20.7,69.23 21.59,68.34 23.5,68.34 28.68,73.53 31.66,73.53 33.56,75.42 42.54,75.42 FT-R24.2 FT-R23.2
V+4
  Top 0.406: SV5.1 69.22,48.66 66.67,48.66 65.83,47.81 FT-R29.2
  Top 0.508: C9.1 67.41,22.94 IC9.12
  Top 1.27: 69.6,20.76 C9.1 | USB-POLY5.1 69.6,20.76 | 69.6,20.76 69.6,21.1 70.48,21.99 70.48,23.89 65.3,29.08 65.3,32.06 63.4,33.95 63.4,42.93 FT-R30.2 FT-R29.2
V+5
  Top 0.406: SV6.1 90.81,48.66 88.27,48.66 87.42,47.81 FT-R35.2
  Top 0.508: C11.1 89,22.94 IC11.12
  Top 1.27: 91.19,20.76 C11.1 | USB-POLY6.1 91.19,20.76 | 91.19,20.76 91.19,21.1 92.08,21.99 92.08,23.89 86.89,29.08 86.89,32.06 84.99,33.95 84.99,42.93 FT-R36.2 FT-R35.2
VDD  (1 unrouted)
VDD1  (1 unrouted)
VDD2  (1 unrouted)
VDD3  (1 unrouted)
VDD4  (1 unrouted)
VDD5  (1 unrouted)

## Text on the board
tPlace: TXD | RXD | TXD | RXD | TXD | RXD | RXD | RXD | TXD | TXD | TXD | RXD
bPlace: Thanks for your support | GND | TXD | RXD | +3V3 | +5V | Thanks for your support | GND | TXD | RXD | +3V3 | GND | TXD | RXD | +3V3 | +5V | GND | TXD | RXD | +3V3 | +5V | +5V | Thanks for your support | GND | TXD | RXD | +3V3 | +5V | Thanks for your support | Thanks for your support | Thanks for your support | GND | TXD | RXD | +3V3 | +5V